# Altium PCB PCB1.PcbDoc
Units mil, origin at the board's own origin, x right, y up, seen from the top; angles counter-clockwise.
Board outline 3543.31 x 2362.2 mil, 2 copper layers (Top Layer, Bottom Layer); 30 components, 25 nets, 137 pads, 19 vias.
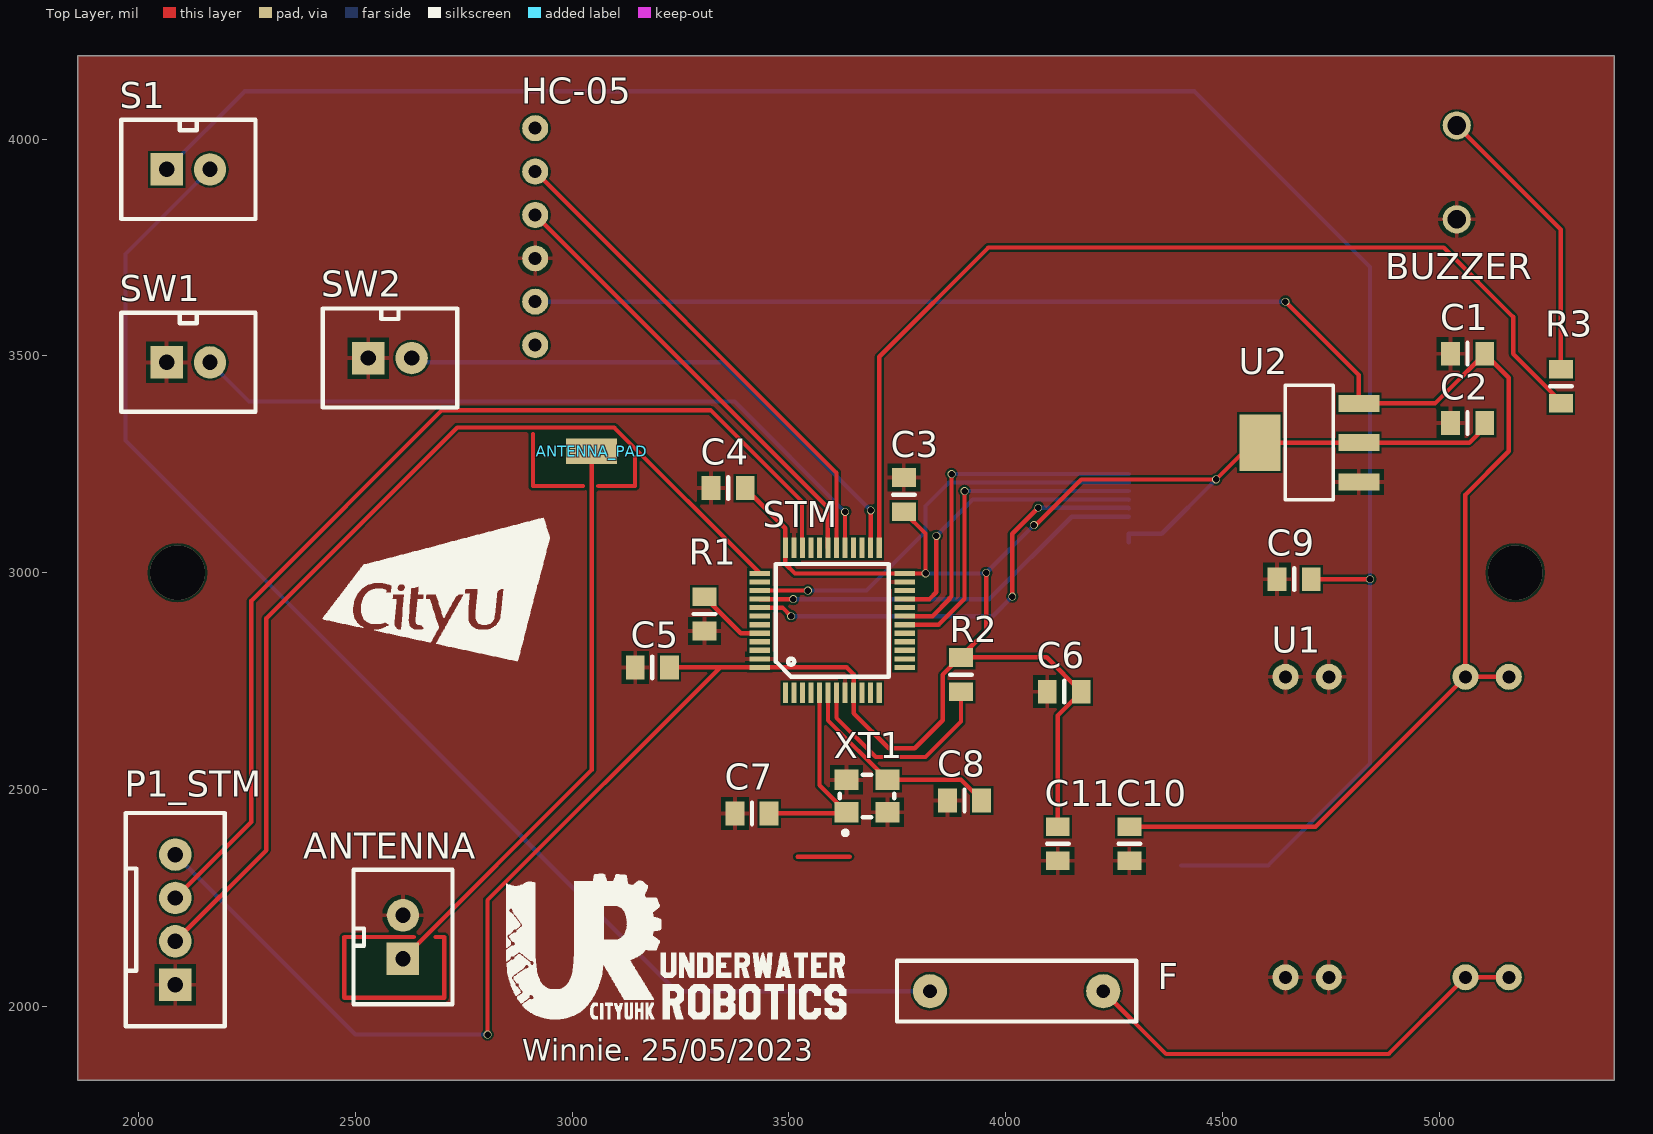
[diagram p0: Top Layer view]
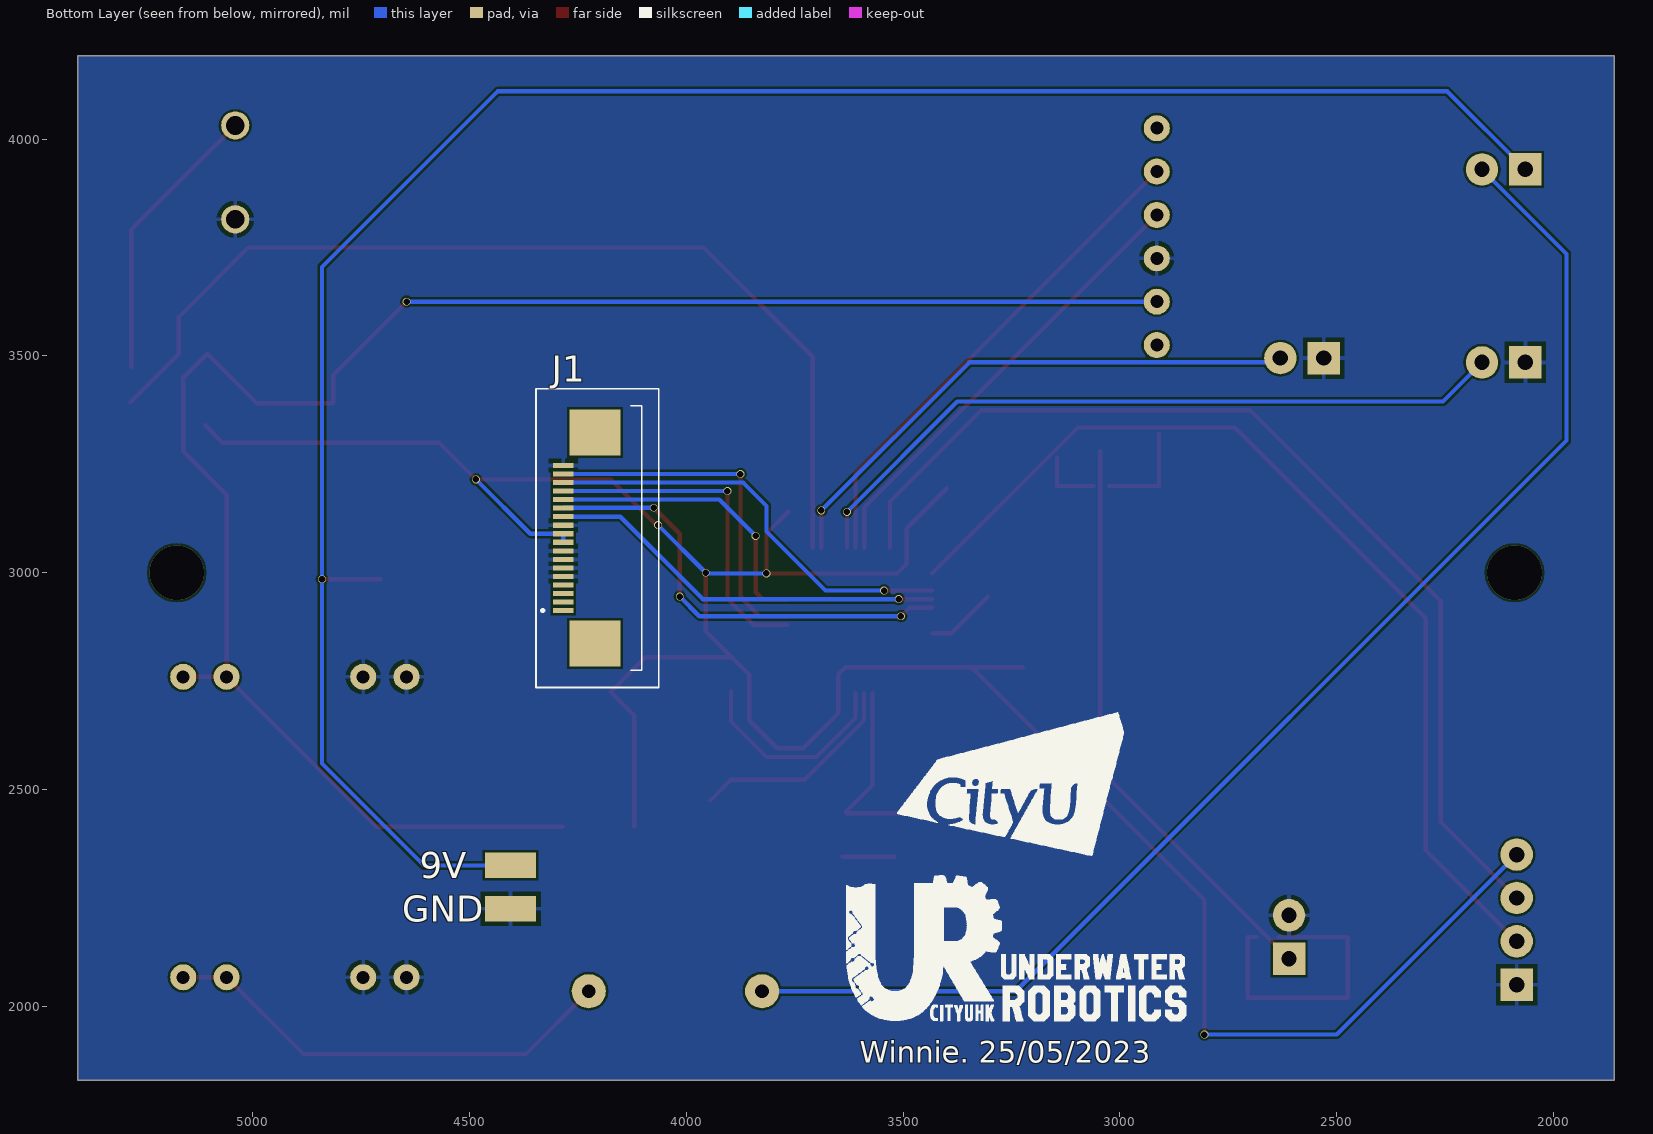
[diagram p1: Bottom Layer view, seen from below]
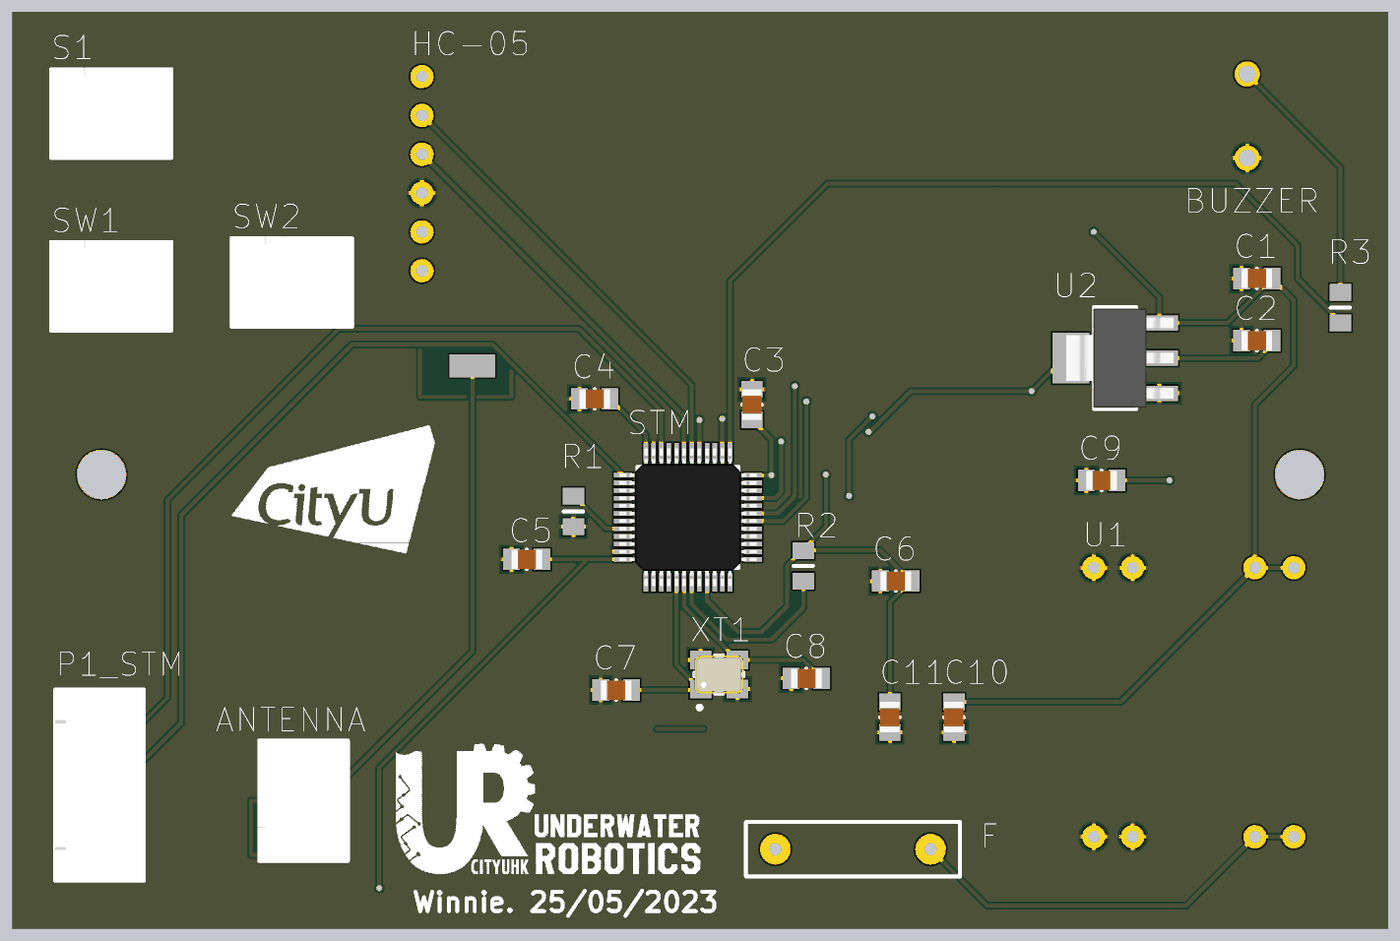
[diagram p2: 3D render of the assembled board from above, using the file's embedded part models]

## Layer stack, top to bottom
Top Solder: solder mask 0.4, Solder Resist, Dk 3.5
Top Layer: signal copper 1.4
Dielectric 1: dielectric 12.6, FR-4, Dk 4.8
Bottom Layer: signal copper 1.4
Bottom Solder: solder mask 0.4, Solder Resist, Dk 3.5

## Board outline
1860,1830 1860,4192.2 5403.31,4192.2 5403.31,1830

## Design rules (kind name [scope] priority, off if disabled: settings)
Clearance [All] p1: gap=5 ignorepadtopadclearanceinfootprint=TRUE
PolygonConnect [All] p1: connectstyle=Relief reliefconductorwidth=10 reliefentries=4 polygonreliefangle="90 Angle" airgapwidth=10
RoutingVias [All] p1: holewidth=28 width=50 viastyle="Through Hole" minholewidth=28 minwidth=50 maxholewidth=28 maxwidth=50
SolderMaskExpansion [All] p1: expansion=4
Width [All] p1: maxlimit=10 minlimit=10 preferedwidth=10
30 further rules are at their usual default settings.

## Components (designator, comment, footprint, x,y, rotation, side; value= is the part's Value field where it differs from the comment)
9V "1-Pin Pad" "1-Pin Pad" 4405,2325 r90 bottom
ANTENNA "2Pin" XH2.54-2pin 2610,2160 r90 top
ANTENNA_PAD "1-Pin Pad" "1-Pin Pad" 3045,3280 r90 top
BUZZER "KPEG-204A" KPEG204A 5040,4031.54 r0 top
C1 "100np" C0805 5065,3505 r0 top
C2 "100np" C0805 5065,3345 r0 top
C3 "100np" C0805 3765,3180 r270 top
C4 "100np" C0805 3360,3195 r0 top
C5 "100np" C0805 3185,2781.73 r180 top
C6 "100np" C0805 4135,2725.63 r180 top
C7 "22pF" C0805 3415,2445 r0 top
C8 "22pF" C0805 3905,2475 r0 top
C9 "100pF" C0805 4665,2985 r0 top
C10 "100pF" C0805 4285,2375 r90 top
C11 "100pF" C0805 4120,2375 r90 top
F "Fuse" "FUSE-PPTC-30V - 5A" 4025,2035 r0 top
GND "1-Pin Pad" "1-Pin Pad" 4405,2225 r90 bottom
HC-05 "Bluetooth" hc-05 2915,3525 r90 top
J1 "XF3M_1_-1815-1B" 68711814022 4205,3080 r90 bottom
P1_STM "4Pin" XH2.54-4pin 2085,2200 r90 top
R1 "100K" R0805 3305,2905 r270 top
R2 "100K" R0805 3896.97,2765 r270 top
R3 "1000" R0805 5280,3430 r90 top
S1 "2Pin" XH2.54-2pin 2115,3930 r0 top
STM "STM32F103C8T6" LQFP48 3600,2890 r0 top
SW1 "2Pin" XH2.54-2pin 2115,3485 r0 top
SW2 "2Pin" XH2.54-2pin 2580,3495 r0 top
U1 "STEP_DOWN_MODULE_5V" STEP_DOWN_MODULE_5V 4645.04,2067.09 r90 top
U2 "AMS1117" "AMS1117 - SOT-223" 4700,3300 r180 top
XT1 "8MhZ" 3225-P 3680,2485 r0 top

## Footprints (in the part's own frame and the unit in brackets; to place one, negate y for a bottom-side part, rotate by r counter-clockwise, add the part's x,y. Pads: shape width x height; smd on the part's side, far side on the other; paste and mask are expansions set on the pad)
"1-Pin Pad" [mm]
  rect 1.5x3 smd: 1(0,0)
3225-P [mm]
  rect 1.4x1.2 smd: 1(-1.2,-0.95) 2(-1.2,0.95) 2(1.2,-0.95) 3(1.2,0.95)
  silkscreen extent -1.6,-2.29 1.6,1.25, body extent -1.6,-1.25 1.6,1.25, height 0.61
68711814022 [mm]
  rect 0.3x1.2 smd: 1(-4.25,2) 2(-3.75,2) 3(-3.25,2) 4(-2.75,2) 5(-2.25,2) 6(-1.75,2) 7(-1.25,2) 8(-0.75,2) 9(-0.25,2) 10(0.25,2) 11(0.75,2) 12(1.25,2) 13(1.75,2) 14(2.25,2) 15(2.75,2) 16(3.25,2) 17(3.75,2) 18(4.25,2)
  rect 2.7x3 smd: MP1(-6.18,0.14) MP2(6.18,0.14)
  silkscreen extent -8.75,-3.6 8.75,3.6, body extent -7.75,-2.6 7.75,2.57, height 2.4
"AMS1117 - SOT-223" [mm] "Tab is Output"
  rect 2.4x1 smd: 1(-2.9,2.3) 2(-2.9,0) 3(-2.9,-2.3)
  rect 2.4x3.3 smd: 2(2.9,0)
  silkscreen extent -1.4,-3.35 1.4,3.35, body extent -3.81,-3.25 3.19,3.25, height 1.59
C0805 [mm]
  rect 1.1x1.4 smd: 1(-1,0) 2(1,0)
  silkscreen extent 0,-0.64 0,0.64, body extent -1,-0.62 1,0.63, height 0.6
"FUSE-PPTC-30V - 5A" [mm]
  round 2 hole 0.8: 1(-5.075,0) 2(5.075,0)
  silkscreen extent -7,-1.78 7,1.78
hc-05 [mil]
  round 60 hole 30: 1(0,0) 2(100,0) 3(200,0) 4(300,0) 5(400,0) 6(500,0)
KPEG204A [mm]
  round 1.65 hole 1.1: 1(0,0) 2(0,-5.5)
LQFP48 [mm]
  rect 0.3x1.2 smd: 1(-2.75,-4.25) 2(-2.25,-4.25) 3(-1.75,-4.25) 4(-1.25,-4.25) 5(-0.75,-4.25) 6(-0.25,-4.25) 7(0.25,-4.25) 8(0.75,-4.25) 9(1.25,-4.25) 10(1.75,-4.25) 11(2.25,-4.25) 12(2.75,-4.25) 25(2.75,4.25) 26(2.25,4.25) 27(1.75,4.25) 28(1.25,4.25) 29(0.75,4.25) 30(0.25,4.25) 31(-0.25,4.25) 32(-0.75,4.25) 33(-1.25,4.25) 34(-1.75,4.25) 35(-2.25,4.25) 36(-2.75,4.25)
  rect 1.2x0.3 smd: 13(4.25,-2.75) 14(4.25,-2.25) 15(4.25,-1.75) 16(4.25,-1.25) 17(4.25,-0.75) 18(4.25,-0.25) 19(4.25,0.25) 20(4.25,0.75) 21(4.25,1.25) 22(4.25,1.75) 23(4.25,2.25) 24(4.25,2.75) 37(-4.25,2.75) 38(-4.25,2.25) 39(-4.25,1.75) 40(-4.25,1.25) 41(-4.25,0.75) 42(-4.25,0.25) 43(-4.25,-0.25) 44(-4.25,-0.75) 45(-4.25,-1.25) 46(-4.25,-1.75) 47(-4.25,-2.25) 48(-4.25,-2.75)
  silkscreen extent -3.3,-3.3 3.3,3.3, body extent -4.5,-4.5 4.5,4.5, height 1.47
R0805 [mm]
  rect 1.1x1.4 smd: 1(-1,0) 2(1,0)
  silkscreen extent 0,-0.64 0,0.64, body extent -0.25,0.25 -0.25,0.25, height 0.25
STEP_DOWN_MODULE_5V [mil]
  round 60 hole 30: 1(0,0) 1(0,-100) 2(0,-414.96) 2(0,-514.96) 3(692.91,-100) 3(692.91,0) 4(692.91,-514.96) 4(692.91,-414.96)
XH2.54-2pin [mm]
  rect 1.9x1.9 hole 0.9: 1(-1.27,0)
  round 1.9 hole 0.9: 2(1.27,0)
  silkscreen extent -3.94,-2.9 3.94,2.9, body extent -4,-3 4,3, height 7
XH2.54-4pin [mm]
  rect 1.9x1.9 hole 0.9: 1(-3.81,0)
  round 1.9 hole 0.9: 2(-1.27,0) 3(1.27,0) 4(3.81,0)
  silkscreen extent -6.25,-2.9 6.25,2.9, body extent -6.25,-2.9 6.25,2.9, height 7

## Part data
BUZZER: "Loudspeaker or Buzzer", Manufacturer_Name=KINGSTATE, Datasheet Link=http://www.farnell.com/datasheets/16476.pdf, Height=16.5mm, Manufacturer_Part_Number=KPEG-204A
C1 C2 C3 C4 C5 C6 C7 C8 C9 C10 C11: library part Cap
F: "PPTC", ComponentLink1Description=Datasheet, ComponentLink1URL=https://www.flying1688.com/products_detail_1566.htm
HC-05: library part HC-05
J1: "Connector", Arrow Part Number=XF3M(1)-1815-1B, Manufacturer_Name="Omron Electronics", Mouser Part Number=653-XF3M1-1815-1B, Arrow Price/Stock=https://www.arrow.com/en/products/xf3m118151b/omron, Datasheet Link=https://omronfs.omron.com/en_US/ecb/products/pdf/en-xf3m.pdf, Height=2mm, Manufacturer_Part_Number=XF3M(1)-1815-1B, Mouser Price/Stock=https://www.mouser.co.uk/ProductDetail/Omron-Electronics/XF3M1-1815-1B?qs=1He0yLMpldDnA2DlFMO4ew%3D%3D
R1 R2 R3: library part Resistor_1
XT1: library part "Passive Crystal"

## Via types
v1: diameter 18, hole 15, Top Layer to Bottom Layer, tented both sides, 17 vias
v2: diameter 125.98, hole 125.98, Top Layer to Bottom Layer, 2 vias

## Nets (pads, with @x,y where several pads share a name; then routed paths per layer and width w, separated by ;. In a path a pad name is that pad's centre, name@x,y a point inside that pad or via, vN(x,y) a via of type N, cw(c..) or ccw(c..) an arc to the next point about the centre after c; other vN are vias at no path point)
3.3V: C2.2 C3.2 C4.2 C5.1 C6.1 C11.2 J1.9 J1.10 P1_STM.4 R2.1 STM.9 STM.24 STM.36 STM.48 U2.2 | length 6193.3
  Top Layer w10: v1(2805,1935) 2805,2245 3341.73,2781.73 ; C5.1 3341.73,2781.73 ; C4.2 3491.73,3102.64 STM.36 3491.73,3020.72 3514.19,2998.27 STM.24 v1(3815,2998.27) 3815,3090.63 C3.2 ; v1(3955,3000) 3955,2865 R2.1@3895,2805 ; v1(4065,3110) 4069.37,3110 4174.37,3215 v1(4485,3215) 4570,3300 4585.83,3300 4814.17,3300 4814.17,3299.44 5068.81,3299.44 C2.2@5109.37,3340 ; C11.2 4120,2670.63 4174.37,2725 4094.37,2805 R2.1@3895,2805 ; 3341.73,2781.73 STM.48 3633.27,2781.73 3649.21,2765.79 STM.9 3649.21,2675.79 3730,2595 3790,2595 3855,2660 3855,2765 R2.1@3895,2805
  Bottom Layer w10: P1_STM.4 2500,1935 v1(2805,1935) ; v1(3815,2998.27) 3953.27,2998.27 v1(3955,3000) v1(4065,3110) ; J1.9 J1.10 4359.84,3089.84 v1(4485,3215)
5V: C1.2 C10.2 HC-05.2 U1.4 U2.3 | length 4199.8
  Top Layer w10: C10.2 4714.37,2414.37 U1.4@5060,2760 ; v1(4645,3625) 4814.17,3455.83 U2.3 4989.92,3390.55 C1.2 5160,3449.37 5160,3280 5060,3180 U1.4@5060,2760 ; U1.4@5160,2760 U1.4@5060,2760
  Bottom Layer w10: HC-05.2 v1(4645,3625)
9V: 9V.1 C9.2 S1.1 | length 4830.3
  Top Layer w10: C9.2 v1(4840,2985)
  Bottom Layer w10: S1.1 2245,4110 4435,4110 4840,3705 v1(4840,2985) 4840,2560 4605,2325 9V.1
AN_PAD: ANTENNA.1 ANTENNA_PAD.1 | length 1350.2
  Top Layer w10: ANTENNA.1 3045,2545 ANTENNA_PAD.1
BUZ: R3.1 STM.25 | length 2316.9
  Top Layer w10: STM.25 3708.27,3498.27 3960,3750 5010,3750 5170,3590 5170,3505 R3.1@5282.19,3392.82
CSX: J1.14 STM.21 | length 687.9
  Top Layer w10: STM.21 3824.21,2939.21 3840,2955 v1(3840,3085)
  Bottom Layer w10: v1(3840,3085) 3924,3169 4283.32,3169 J1.14
DC: J1.15 STM.18 | length 789.5
  Top Layer w10: STM.18 3845.16,2880.16 3905,2940 v1(3905,3188.27)
  Bottom Layer w10: v1(3905,3188.27) J1.15
GND: ANTENNA.2 BUZZER.2 C1.1 C2.1 C3.1 C4.1 C5.2 C6.2 C7.1 C8.1 C9.1 C10.1 C11.1 GND.1 HC-05.3 J1.5 J1.6 J1.7 J1.8 J1.11 J1.18 P1_STM.1 R1.2 STM.8 STM.23 STM.35 STM.47 SW1.1 SW2.1 U1.1 U1.3 U2.1 XT1.2
NetBUZZER_1: BUZZER.1 R3.2 | length 655.9
  Top Layer w10: BUZZER.1 5280,3791.54 R3.2@5280,3475
NetF_1: F.1 S1.2 | length 3087
  Bottom Layer w10: S1.2 1970,3735 1970,3305 3240,2035 F.1
NetF_2: F.2 U1.2 | length 1068.6
  Top Layer w10: F.2 4369.8,1890 4882.91,1890 5060,2067.09 U1.2@5160,2067.09
NetR1_1: R1.1 STM.44 | length 162.4
  Top Layer w10: R1.1 3388.9,2860.47 STM.44
NetR2_2: R2.2 STM.7 | length 484.5
  Top Layer w10: STM.7 3609.84,2665.26 3700.1,2575 3815,2575 3896.97,2656.97 R2.2
OSC_IN: C7.2 STM.5 XT1.1 | length 480.3
  Top Layer w10: C7.2 3630.16,2445 XT1.1 3570.47,2509.88 STM.5
OSC_OUT: C8.2 STM.6 XT1.3 | length 493.8
  Top Layer w10: STM.6 3590.16,2659.49 XT1.3 3896.97,2522.4 C8.2
RESET: J1.17 STM.19 | length 819.3
  Top Layer w10: STM.19 3830.94,2899.84 3871.1,2940 3870,2941.1 3875,2946.1 v1(3875,3227.64)
  Bottom Layer w10: v1(3875,3227.64) J1.17
RXD: HC-05.5 STM.30 | length 1155.5
  Top Layer w10: HC-05.5 3609.84,3230.16 STM.30
SCL: J1.16 STM.39 | length 988.8
  Top Layer w10: STM.39 v1(3543.9,2958.9)
  Bottom Layer w10: v1(3543.9,2958.9) 3678.9,2958.9 3815,3095 3815,3154 3868.95,3207.95 J1.16
SDI: J1.13 STM.41 | length 1048.2
  Top Layer w10: STM.41 3485.32,2919.53 v1(3505,2899.84) ; v1(4015,2945) 4015,3090 v1(4075,3150)
  Bottom Layer w10: v1(3505,2899.84) 3969.84,2899.84 v1(4015,2945) ; v1(4075,3150) 4282.64,3150 J1.13
SDO: J1.12 STM.40 | length 929.8
  Top Layer w10: STM.40 v1(3510,2939.21)
  Bottom Layer w10: v1(3510,2939.21) 3962.01,2939.21 4152.01,3129.21 J1.12
SW1: STM.29 SW1.2 | length 1690.3
  Top Layer w10: STM.29 v1(3629.53,3140.35)
  Bottom Layer w10: SW1.2 2255,3395 3374.88,3395 v1(3629.53,3140.35)
SW2: STM.26 SW2.2 | length 1296.3
  Top Layer w10: STM.26 v1(3688.58,3143.58)
  Bottom Layer w10: SW2.2 2630,3485 3347.17,3485 v1(3688.58,3143.58)
SWCLK: P1_STM.2 STM.37 | length 2292
  Top Layer w10: P1_STM.2 2295,2360 2295,2895 2735,3335 3096.97,3335 3432.68,2999.29 STM.37
SWDIO: P1_STM.3 STM.34 | length 2404.5
  Top Layer w10: P1_STM.3 2260,2425 2260,2935 2700,3375 3319.37,3375 3530.32,3164.05 3530.32,3058.1 STM.34
TXD: HC-05.4 STM.31 | length 1047.3
  Top Layer w10: HC-05.4 3589.38,3150.62 3589.38,3058.1 STM.31
pads on no net: HC-05.1 HC-05.6 J1.1 J1.2 J1.3 J1.4 J1.MP1 J1.MP2 STM.1 STM.2 STM.3 STM.4 STM.10 STM.11 STM.12 STM.13 STM.14 STM.15 STM.16 STM.17 STM.20 STM.22 STM.27 STM.28 STM.32 STM.33 STM.38 STM.42 STM.43 STM.45 STM.46
copper on no net: | length 1195
  Top Layer w10: 2635,2160 2545,2160 2475,2160 2475,2020 2705,2020 2705,2160 2685,2160 ; 2910,3320 2910,3200 3025,3200 ; 3060,3200 3145,3200 3145,3265 ; 3520,2345 3640,2345
  other v2: 2090,3000 5175,3000

## Polygon pours and split planes (outlines as drawn)
GND on Top Layer "NONET_L01_P000" (solid, remove dead copper, pour order 0): 1860,1830 1860,4192.2 5403.31,4192.2 5403.31,1830
GND on Bottom Layer "Top Layer-No Net" (solid, remove dead copper, pour order 1): 1860,1830 1860,4192.2 5403.31,4192.2 5403.31,1830

## Silkscreen, mask and mechanical layers (free items; w line width, h text height)
Top Overlay:
  drawing of 4125 lines, arcs and shapes, not listed
  text "Winnie. 25/05/2023" at 2885,1875 h50
Bottom Overlay:
  drawing of 4125 lines, arcs and shapes, not listed
  text "Winnie. 25/05/2023" at 3600,1870 h50
Mechanical 1:
  the board outline again, w10